# Altium PCB nanotiny.PcbDoc
Units mm, origin at the board's own origin, x right, y up, seen from the top; angles counter-clockwise.
Board outline 86.2 x 20 mm, 4 copper layers (Top Layer, Int1 (GND), Int2 (PWR), Bottom Layer), stack 1.369 mm thick; 28 components, 79 nets, 290 pads, 103 vias.
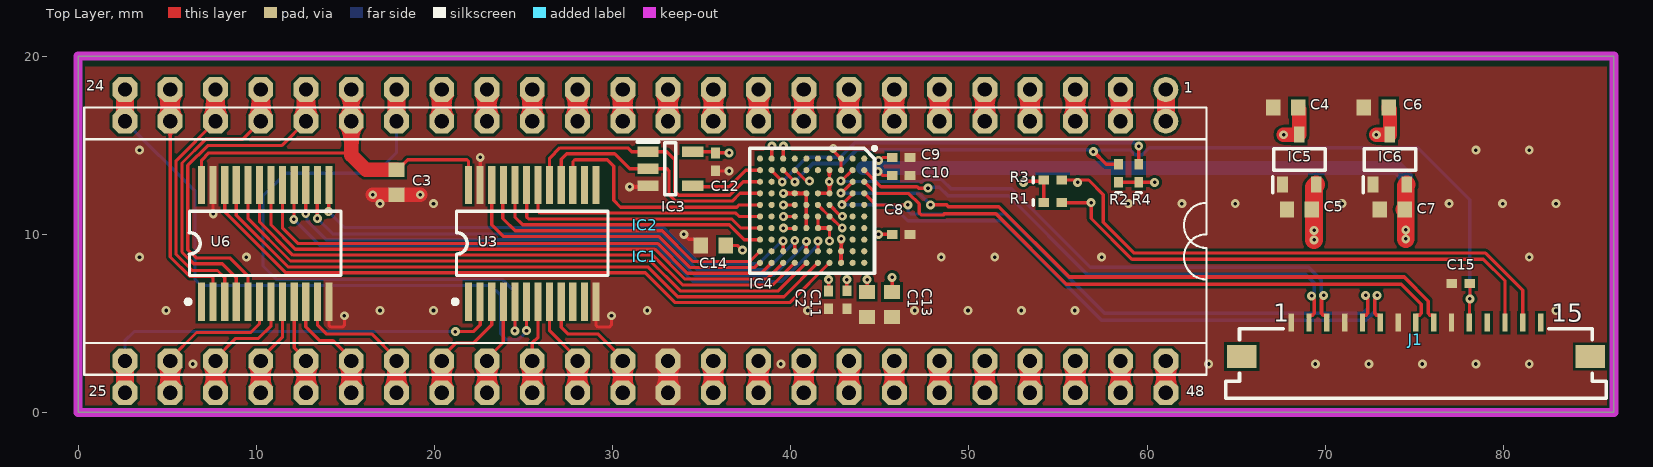
[diagram p0: Top Layer view]
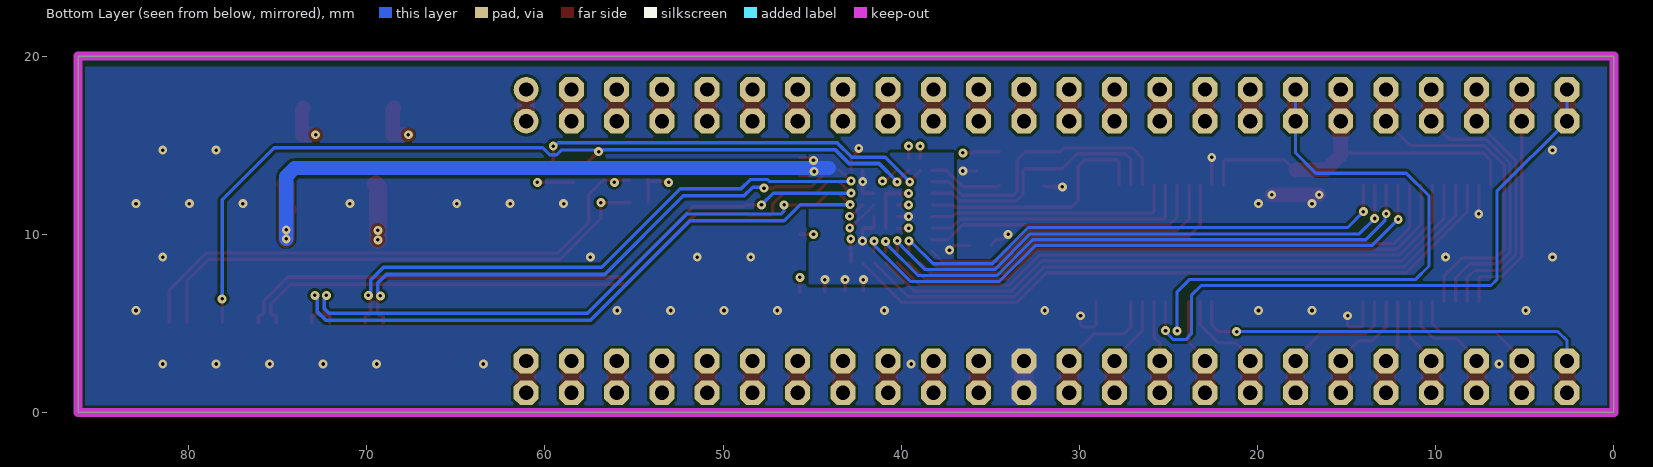
[diagram p1: Bottom Layer view, seen from below]
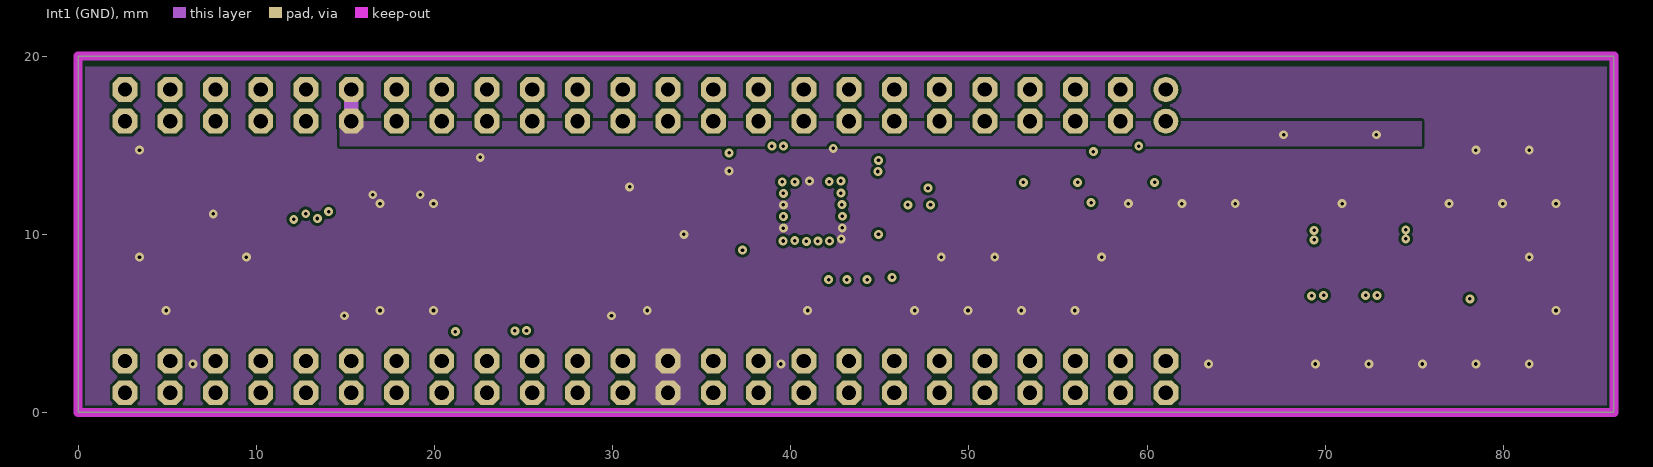
[diagram p2: Int1 (GND)]
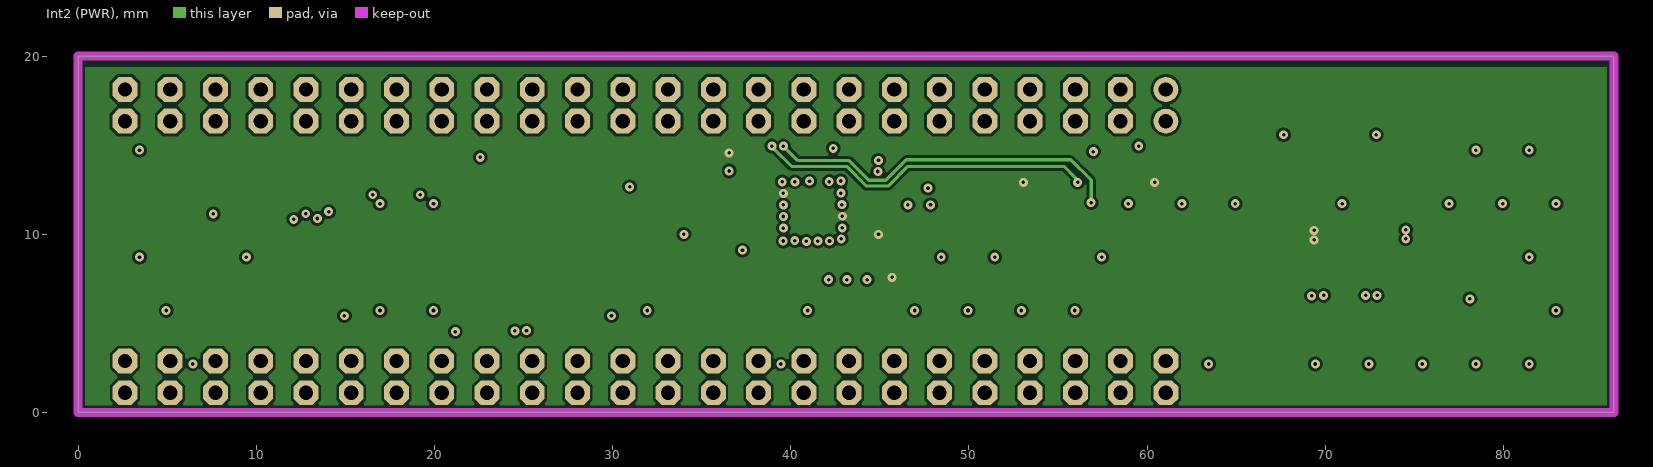
[diagram p3: Int2 (PWR)]

## Layer stack, top to bottom
Top Solder: solder mask 0.0254, SM-001, Dk 4
Top Layer: signal copper 0.035
Dielectric 1: prepreg 0.1295, PP-017, Dk 4.3
Dielectric 2: prepreg 0.1295, PP-017, Dk 4.3
Int1 (GND): signal copper 0.035
Dielectric 3: core 0.7112, Core-039, Dk 4.8
Int2 (PWR): signal copper 0.035
Dielectric 4: prepreg 0.1295, PP-017, Dk 4.3
Dielectric 5: prepreg 0.1295, PP-017, Dk 4.3
Bottom Layer: signal copper 0.035
Bottom Solder: solder mask 0.0254, SM-001, Dk 4

## Board outline
0,0 0,20 86.196,20 86.196,0

## Design rules (kind name [scope] priority, off if disabled: settings)
Clearance [All] p1: gap=0.15 ignorepadtopadclearanceinfootprint=FALSE
ComponentClearance [All] p1 off: gap=0.254 collisioncheckmode=3 verticalgap=0.254 showdistances=FALSE
DiffPairsRouting [All] p1: maxlimit=0.254 minlimit=0.2 mostfreqgap=0.2 toplayer_minwidth=0.18 toplayer_maxwidth=0.381 toplayer_prefwidth=0.18 midlayer1_minwidth=0.18 midlayer1_maxwidth=0.381 midlayer1_prefwidth=0.18 midlayer2_minwidth=0.18 midlayer2_maxwidth=0.381 midlayer2_prefwidth=0.18 bottomlayer_minwidth=0.18 bottomlayer_maxwidth=0.381 bottomlayer_prefwidth=0.18 maxuncoupledlength=12.7
HoleSize [All] p1: absolutevalues=TRUE maxlimit=2.54 minlimit=0.2 maxpercent=80.000 minpercent=20.000
PolygonConnect [All] p1: connectstyle=Direct reliefconductorwidth=0.254 reliefentries=4 polygonreliefangle="90 Angle" airgapwidth=0.254
RoutingVias [All] p1: holewidth=0.2 width=0.5 viastyle="Through Hole" minholewidth=0.2 minwidth=0.5 maxholewidth=0.3 maxwidth=0.6
SolderMaskExpansion [All] p1: expansion=0.102 istentingtop=FALSE
Width [All] p1: maxlimit=1 minlimit=0.18 preferedwidth=0.18
27 further rules are at their usual default settings.

## Classes and differential pairs
differential pair CSICK: +CSICK_P -CSICK_N
differential pair CSI1: +CSI1_P -CSI1_N
differential pair CSI0: +CSI0_P -CSI0_N

## Components (designator, comment, footprint, x,y, rotation, side; value= is the part's Value field where it differs from the comment)
C1 "Cap Semi" 1608[0603] 44.286,6.059 r270 top value=2u2
C2 "Cap Semi" 0402 42.127,6.313 r90 top value=100nF
C3 "Cap Semi" 1608[0603] 17.87,12.917 r90 top value=2u2
C4 "Cap Semi" 1608[0603] 67.781,17.108 r0 top value=2u2
C5 "Cap Semi" 1608[0603] 68.543,11.393 r180 top value=2u2
C6 "Cap Semi" 1608[0603] 72.861,17.108 r0 top value=2u2
C7 "Cap Semi" 1608[0603] 73.75,11.393 r180 top value=2u2
C8 "Cap Semi" 0402 46.191,9.996 r180 top value=100nF
C9 "Cap Semi" 0402 46.191,14.314 r180 top value=100nF
C10 "Cap Semi" 0402 46.191,13.298 r180 top value=100nF
C11 "Cap Semi" 0402 43.143,6.321 r90 top value=100nF
C12 "Cap Semi" 0402 35.777,14.06 r90 top value=100nF
C13 "Cap Semi" 1608[0603] 45.683,6.059 r270 top value=2u2
C14 "Cap Semi" 1608[0603] 35.65,9.361 r0 top value=100nF
C15 "Cap Semi" 0402 77.597,7.239 r0 top value=100nF
IC1 "DENISE_MOBO" DIP48-6 33.11,8.726 r180 top
IC2 "DENISE_DIP" DIP48-6 33.11,10.504 r180 top
IC3 "SN74LVC1G86DBVR" SOT95P280X145-5N 33.237,13.679 r0 top
IC4 "LIF-MD6000-6KMG80I" BGA80C65P10X10_700X700X120 41.197,11.322 r270 top
IC5 "XC6206P332MR" SOT95P280X130-3N 68.543,14.187 r90 top
IC6 "RT9166-12GVL" SOT95P280X130-3N 73.623,14.187 r90 top
J1 "686115183522" 686115183522 75.083,2.743 r0 top
R1 "Res2" 0402-A 54.7,11.774 r0 top value=1k
R2 "Res2" 0402-A 58.383,13.425 r90 top value=1k
R3 "Res2" 0402-A 54.7,13.044 r0 top value=1k
R4 "Res2" 0402-A 59.526,13.425 r90 top value=1k
U3 "SN74CBTD3861" DB024 25.49,9.488 r0 top
U6 "SN74CBTD3861" DB024 10.504,9.488 r0 top

## Footprints (in the part's own frame and the unit in brackets; to place one, negate y for a bottom-side part, rotate by r counter-clockwise, add the part's x,y. Pads: shape width x height; smd on the part's side, far side on the other; paste and mask are expansions set on the pad)
0402 [mm] "Chip Capacitor, Body 1.0x0.5mm, IPC High Density"
  rect 0.6x0.5 smd: 1(-0.5,0) 2(0.5,0)
  body extent -0.55,-0.3 0.55,0.3, height 1.3
0402-A [mm] "Chip Inductor, Body 1.0x0.5mm, IPC High Density"
  rect 0.6x0.5 smd: 1(-0.5,0) 2(0.5,0)
  silkscreen extent -1.1,-0.15 -1.1,0.15, body extent -0.55,-0.3 0.55,0.3, height 0.55
1608[0603] [mm] "Chip Capacitor, Body 1.6x0.8mm, IPC High Density"
  rect 0.8x0.9 smd: 1(-0.7,0) 2(0.7,0)
  body extent -0.87,-0.48 0.87,0.48, height 1.3
686115183522 [mm] "ZIF Connectors, Horizontal, Bottom Contact Low Profile, pitch 1mm, 15p"
  rect 0.3x1 smd: 1(-7,2.3) 2(-6,2.3) 3(-5,2.3) 4(-4,2.3) 5(-3,2.3) 6(-2,2.3) 7(-1,2.3) 8(0,2.3) 9(1,2.3) 10(2,2.3) 11(3,2.3) 12(4,2.3) 13(5,2.3) 14(6,2.3) 15(7,2.3)
  rect 1.65x1.3 smd: MP1(-9.775,0.4) MP2(9.775,0.4)
  silkscreen extent -10.68,-1.95 10.68,1.95, body extent -10.6,-1.9 10.6,2.35, height 1.24
BGA80C65P10X10_700X700X120 [mm]
  round 0.346 smd: A1(-2.925,2.925) A2(-2.275,2.925) A3(-1.625,2.925) A4(-0.975,2.925) A5(-0.325,2.925) A6(0.325,2.925) A7(0.975,2.925) A8(1.625,2.925) A9(2.275,2.925) A10(2.925,2.925) B1(-2.925,2.275) B2(-2.275,2.275) B3(-1.625,2.275) B4(-0.975,2.275) B5(-0.325,2.275) B6(0.325,2.275) B7(0.975,2.275) B8(1.625,2.275) B9(2.275,2.275) B10(2.925,2.275) C1(-2.925,1.625) C2(-2.275,1.625) C9(2.275,1.625) C10(2.925,1.625) D1(-2.925,0.975) D2(-2.275,0.975) D4(-0.975,0.975) D5(-0.325,0.975) D6(0.325,0.975) D7(0.975,0.975) D9(2.275,0.975) D10(2.925,0.975) E1(-2.925,0.325) E2(-2.275,0.325) E4(-0.975,0.325) E5(-0.325,0.325) E6(0.325,0.325) E7(0.975,0.325) E9(2.275,0.325) E10(2.925,0.325) F1(-2.925,-0.325) F2(-2.275,-0.325) F4(-0.975,-0.325) F5(-0.325,-0.325) F6(0.325,-0.325) F7(0.975,-0.325) F9(2.275,-0.325) F10(2.925,-0.325) G1(-2.925,-0.975) G2(-2.275,-0.975) G4(-0.975,-0.975) G5(-0.325,-0.975) G6(0.325,-0.975) G7(0.975,-0.975) G9(2.275,-0.975) G10(2.925,-0.975) H1(-2.925,-1.625) H2(-2.275,-1.625) H9(2.275,-1.625) H10(2.925,-1.625) J1(-2.925,-2.275) J2(-2.275,-2.275) J3(-1.625,-2.275) J4(-0.975,-2.275) J5(-0.325,-2.275) J6(0.325,-2.275) J7(0.975,-2.275) J8(1.625,-2.275) J9(2.275,-2.275) J10(2.925,-2.275) K1(-2.925,-2.925) K2(-2.275,-2.925) K3(-1.625,-2.925) K4(-0.975,-2.925) K5(-0.325,-2.925) K6(0.325,-2.925) K7(0.975,-2.925) K8(1.625,-2.925) K9(2.275,-2.925) K10(2.925,-2.925)
  silkscreen extent -3.6,-3.5 3.5,3.6, body extent -3.5,-3.5 3.5,3.5, height 1.2
DB024 [mm] "SSOP, Plastic; 24 Leads; Body Width 5.3 mm; Pitch 0.65 mm"
  rect 0.4x2.15 smd: 1(-3.575,-3.275) 2(-2.925,-3.275) 3(-2.275,-3.275) 4(-1.625,-3.275) 5(-0.975,-3.275) 6(-0.325,-3.275) 7(0.325,-3.275) 8(0.975,-3.275) 9(1.625,-3.275) 10(2.275,-3.275) 11(2.925,-3.275) 12(3.575,-3.275) 13(3.575,3.275) 14(2.925,3.275) 15(2.275,3.275) 16(1.625,3.275) 17(0.975,3.275) 18(0.325,3.275) 19(-0.325,3.275) 20(-0.975,3.275) 21(-1.625,3.275) 22(-2.275,3.275) 23(-2.925,3.275) 24(-3.575,3.275)
  silkscreen extent -4.45,-3.4 4.25,1.8
DIP48-6 [mil]
  round 55.12 hole 31.5: 1(-1100,-300)
  oct 55.12x55.12 hole 31.5: 2(-1000,-300) 3(-900,-300) 4(-800,-300) 5(-700,-300) 6(-600,-300) 7(-500,-300) 8(-400,-300) 9(-300,-300) 10(-200,-300) 11(-100,-300) 12(0,-300) 13(100,-300) 14(200,-300) 15(300,-300) 16(400,-300) 17(500,-300) 18(600,-300) 19(700,-300) 20(800,-300) 21(900,-300) 22(1000,-300) 23(1100,-300) 24(1200,-300) 25(1200,300) 26(1100,300) 27(1000,300) 28(900,300) 29(800,300) 30(700,300) 31(600,300) 32(500,300) 33(400,300) 34(300,300) 35(200,300) 36(100,300) 37(0,300) 38(-100,300) 39(-200,300) 40(-300,300) 41(-400,300) 42(-500,300) 43(-600,300) 44(-700,300) 45(-800,300) 46(-900,300) 47(-1000,300) 48(-1100,300)
  silkscreen extent -1190,-260 1290,260
SOT95P280X130-3N [mm]
  rect 0.9x0.6 smd: 1(-1.4,0.95) 2(-1.4,-0.95) 3(1.4,0)
  silkscreen extent -1.85,-1.45 0.6,1.5, body extent -1.4,-1.45 1.4,1.45, height 1.3
SOT95P280X145-5N [mm]
  rect 1.2x0.6 smd: 1(-1.25,0.95) 2(-1.25,0) 3(-1.25,-0.95) 4(1.25,-0.95) 5(1.25,0.95)
  silkscreen extent -1.85,-1.45 0.3,1.5, body extent -1.4,-1.45 1.4,1.45, height 1.45

## Part data
C1 C2 C3 C4 C5 C6 C7 C8 C9 C10 C11 C12 C13 C14 C15: "Capacitor (Semiconductor SIM Model)", LatestRevisionDate=29-May-2009, LatestRevisionNote="IPC-7351 Footprint Added.", PackageDescription="Chip Capacitor", PackageReference=C1206, Published=8-Jun-2000, Publisher="Altium Limited"
IC1: library part DENISE_DIP
IC3: "Integrated Circuit", Manufacturer_Name="Texas Instruments", Mouser Part Number=595-SN74LVC1G86DBVR, Arrow Part Number=SN74LVC1G86DBVR, Arrow Price/Stock=https://www.arrow.com/en/products/sn74lvc1g86dbvr/texas-instruments, Datasheet Link=http://www.ti.com/lit/ds/symlink/sn74lvc1g86.pdf, Height=1.45mm, Manufacturer_Part_Number=SN74LVC1G86DBVR, Mouser Price/Stock=https://www.mouser.co.uk/ProductDetail/Texas-Instruments/SN74LVC1G86DBVR/?qs=d9gICRQKuCcyH%2F0J6yE9tQ%3D%3D
IC4: "Integrated Circuit", Manufacturer_Name="Lattice Semiconductor", Mouser Part Number=842-LIFMD60006KMG80I, Arrow Part Number=LIF-MD6000-6KMG80I, Arrow Price/Stock=https://www.arrow.com/en/products/lif-md6000-6kmg80i/lattice-semiconductor, Datasheet Link=http://www.latticesemi.com/view_document?document_id=51662, Height=1.2mm, Manufacturer_Part_Number=LIF-MD6000-6KMG80I, Mouser Price/Stock=https://www.mouser.co.uk/ProductDetail/Lattice/LIF-MD6000-6KMG80I/?qs=F5EMLAvA7IDEfdUebejsLA%3D%3D
IC5: "Integrated Circuit", Manufacturer_Name=Torex, Datasheet Link=http://www.torexsemi.com/products/voltage_regulators/data/XC6206.pdf, Height=1.3mm, Manufacturer_Part_Number=XC6206P332MR
IC6: library part XC6206P332MR, "Integrated Circuit", Manufacturer_Name=Torex, Datasheet Link=http://www.torexsemi.com/products/voltage_regulators/data/XC6206.pdf, Height=1.3mm, Manufacturer_Part_Number=XC6206P332MR
J1: "WR-FPC SMT ZIF Horizontal Bottom Contact Low Profile, pitch 1mm, 15p", Contact Resistance=30mOhm, Manufacturer="Wurth Elektronik", Operating Temperature="-25 to +85degC", Rated Current=0.8A, Working Voltage=50VAC, ComponentLink1Description=Manufacturer, ComponentLink1URL=http://www.we-online.de, ComponentLink2Description=Datasheet, ComponentLink2URL=https://katalog.we-online.com/em/datasheet/686115183522.pdf, Length=21.2mm, Manufacturer Part Number=686115183522, Mounting Technology=SMT, Packaging="Tape and Reel", Pin Number=15, Pitch=1mm, Published Date="March 2021", Type=Horizontal
R1 R2 R3 R4: "Resistor", LatestRevisionDate=17-Jul-2002, LatestRevisionNote="Re-released for DXP Platform.", PackageDescription="Axial Device, Thru-Hole; 2 Leads; 0.4 in Pin Spacing", PackageReference=AXIAL-0.4, Published=8-Jun-2000, Publisher="Altium Limited"
U3 U6: "10-bit FET bus level shifting switch"

## Via types
v1: diameter 0.5, hole 0.2, Top Layer to Bottom Layer, tented both sides, 103 vias

## Nets (pads, with @x,y where several pads share a name; then routed paths per layer and width w, separated by ;. In a path a pad name is that pad's centre, name@x,y a point inside that pad or via, vN(x,y) a via of type N, cw(c..) or ccw(c..) an arc to the next point about the centre after c; other vN are vias at no path point)
7M: IC3.2 IC4.K4 U3.16 | length 14.8
  Top Layer w0.18: U3.16 27.115,14.209 27.424,14.517 30.113,14.517 30.951,13.679 IC3.2 33.056,13.679 33.161,13.574 33.161,12.231 33.364,12.028 33.533,11.859 36.71,11.859 37.148,12.297 IC4.K4
14M: IC3.4 IC4.K2 | length 4.2
  Top Layer w0.18: IC3.4 34.553,12.663 36.539,12.663 37.473,13.597 IC4.K2
B0: IC4.K6 U3.18 | length 14.1
  Top Layer w0.18: U3.18 25.811,12.759 25.811,11.294 25.916,11.188 36.916,11.188 37.107,10.997 IC4.K6
B1: IC4.K10 U3.22 | length 18.4
  Top Layer w0.18: U3.22 23.215,10.535 23.882,9.868 32.61,9.868 34.336,8.142 37.972,8.142 38.227,8.397 IC4.K10
B2: IC4.H10 U6.18 | length 32.6
  Top Layer w0.18: U6.18 10.829,10.522 12.193,9.158 32.386,9.158 34.062,7.482 38.657,7.482 IC4.H10
B3: IC4.J10 U6.17 | length 31.2
  Top Layer w0.18: U6.17 11.479,10.339 12.33,9.488 32.523,9.488 34.199,7.812 38.337,7.812 IC4.J10
BLANK: IC4.K9 U3.21 | length 17.6
  Top Layer w0.18: U3.21 23.839,12.737 23.839,10.885 24.526,10.198 32.781,10.198 34.507,8.472 37.697,8.472 IC4.K9
BURST: IC4.K7 U3.19 | length 15.2
  Top Layer w0.18: U3.19 25.185,12.743 25.185,10.964 25.291,10.858 36.693,10.858 37.204,10.347 IC4.K7
CCK: IC4.K5 U3.15 | length 14.1
  Top Layer w0.18: U3.15 27.776,12.774 27.776,14.082 27.882,14.187 29.703,14.187 30.062,13.828 30.062,11.901 30.443,11.52 36.965,11.52 37.092,11.647 IC4.K5
CDAC: IC3.1 IC4.K3 U3.17 | length 16
  Top Layer w0.18: U3.17 26.465,14.273 27.039,14.847 30.849,14.847 31.067,14.629 IC3.1 33.049,14.629 33.491,14.187 33.491,12.409 33.711,12.189 36.573,12.189 37.331,12.947 IC4.K3
CRESET_B: C15.2 IC4.H2 J1.11 R2.2 | length 50.5
  Top Layer w0.18: J1.11 78.099,5.059 78.099,6.354 v1(78.115,6.37) 78.115,7.221 C15.2
  Top Layer w0.2: IC4.H2 v1(40.226,12.944) ; v1(56.986,14.643) 57.704,13.925 R2.2
  Bottom Layer w0.18: v1(56.986,14.643) 57.048,14.704 57.224,14.704 57.252,14.732 59.055,14.732 59.328,14.459 59.729,14.459 60.129,14.859 75.184,14.859 78.105,11.938 v1@78.105,6.42
  Bottom Layer w0.2: v1(40.226,12.944) 40.226,12.951 41.247,13.972 42.928,13.972 43.688,14.732 56.719,14.732 56.751,14.7 56.929,14.7 v1(56.986,14.643)
CSI0_N: IC4.A2 J1.2 | length 30.2
  Top Layer w0.18: IC4.A2 45.056,12.663 47.091,12.663 47.168,12.586 v1(47.701,12.586)
  Top Layer w0.2: J1.2 69.083,5.393 69.133,5.443 69.266,5.443 69.383,5.561 v1@69.383,6.361
  Bottom Layer w0.2: v1(47.701,12.586) 47.758,12.643 48.334,12.643 48.822,12.155 52.23,12.155 56.644,7.741 68.894,7.741 69.369,7.266 69.369,6.759 69.23,6.62 v1(69.23,6.539)
CSI0_P: IC4.B2 J1.3 | length 32.7
  Top Layer w0.18: v1(42.807,12.989) 42.835,12.989 43.444,13.597 IC4.B2
  Top Layer w0.2: v1@69.783,6.361 69.783,5.561 69.901,5.443 70.033,5.443 70.083,5.393 J1.3
  Bottom Layer w0.18: v1(42.807,12.989) 42.842,12.954 47.376,12.954 47.498,13.076 48.467,13.076 48.477,13.066
  Bottom Layer w0.2: 48.477,13.066 48.988,12.555 52.395,12.555 56.81,8.141 69.059,8.141 69.769,7.431 69.769,6.788 69.908,6.649 v1(69.908,6.567)
CSI1_N: IC4.A4 J1.5 | length 33.7
  Top Layer w0.18: IC4.A4 44.772,11.647 v1(46.572,11.647)
  Top Layer w0.2: J1.5 72.083,5.393 72.133,5.443 72.266,5.443 72.383,5.561 v1@72.383,6.361
  Bottom Layer w0.18: v1(46.572,11.647) 46.584,11.635 46.584,11.284 46.73,11.138 52.035,11.138
  Bottom Layer w0.2: 52.035,11.138 57.602,5.57 72.118,5.57 72.383,5.835 72.383,6.361 72.258,6.486 v1(72.258,6.567)
CSI1_P: IC4.B4 J1.6 | length 36.2
  Top Layer w0.2: v1(42.865,11.662) 43.472,12.269 IC4.B4 ; v1@72.783,6.361 72.783,5.561 72.901,5.443 73.033,5.443 73.083,5.393 J1.6
  Bottom Layer w0.18: v1(42.865,11.662) 45.669,11.662 46.573,10.758 51.839,10.758 51.849,10.748
  Bottom Layer w0.2: 51.849,10.748 51.859,10.748 57.437,5.17 72.284,5.17 72.783,5.67 72.783,6.361 72.908,6.486 v1(72.908,6.567)
CSICK_N: IC4.A3 J1.8 | length 35.7
  Top Layer w0.18: IC4.A3 44.787,12.282 46.63,12.282 47.207,11.705 47.207,11.191 47.313,11.085 48.55,11.085
  Top Layer w0.2: 48.55,11.085 48.617,11.152 51.512,11.152 55.462,7.202 74.258,7.202 75.383,6.077 75.383,5.561 75.266,5.443 75.133,5.443 75.083,5.393 J1.8
CSICK_P: IC4.B3 J1.9 | length 37.8
  Top Layer w0.2: v1(42.807,12.311) 42.836,12.311 IC4.B3 ; v1(47.842,11.647) 48.728,11.647 48.738,11.647 48.833,11.552 51.678,11.552 55.628,7.602 74.424,7.602 75.783,6.243 75.783,5.561 75.901,5.443 76.033,5.443 76.083,5.393 J1.9
  Bottom Layer w0.2: v1(42.807,12.311) 47.179,12.311 v1(47.842,11.647)
G0: IC4.E9 U6.16 | length 34.4
  Top Layer w0.18: v1(12.105,10.835) 12.117,10.847 12.117,12.751 U6.16 ; IC4.E9 v1(41.522,9.619)
  Bottom Layer w0.18: v1(12.105,10.835) 13.579,9.361 32.475,9.361 34.481,7.355 39.486,7.355 41.461,9.33 41.461,9.558 v1(41.522,9.619)
G1: IC4.F9 U6.15 | length 32.7
  Top Layer w0.18: v1(12.779,11.15) U6.15 ; v1@40.869,9.604 40.871,9.602 40.871,9.049 IC4.F9
  Bottom Layer w0.18: v1(12.779,11.15) 12.841,11.089 12.841,10.777 13.926,9.691 32.612,9.691 34.618,7.685 39.054,7.685 40.735,9.366 40.735,9.38 40.872,9.517 v1(40.872,9.604)
G2: IC4.G9 U6.14 | length 31.2
  Top Layer w0.18: v1(13.425,10.885) 13.427,10.887 13.427,12.761 U6.14 ; IC4.G9@40.222,9.048 v1(40.222,9.646)
  Bottom Layer w0.18: v1(13.425,10.885) 14.289,10.021 32.749,10.021 34.755,8.015 38.658,8.015 40.222,9.579 v1(40.222,9.646)
G3: IC4.H9 U6.13 | length 29.3
  Top Layer w0.18: v1(14.06,11.266) 14.07,11.276 14.07,12.754 U6.13 ; IC4.H9 v1@39.572,9.615
  Bottom Layer w0.18: v1(14.06,11.266) 14.949,10.377 32.859,10.377 34.891,8.345 38.208,8.345 39.485,9.622 v1(39.572,9.622)
GND: C1.2 C2.1 C3.1 C4.1 C5.2 C6.1 C7.2 C8.1 C9.1 C10.1 C11.1 C12.1 C13.2 C14.1 C15.1 IC1.37 IC2.37 IC3.3 IC4.C1 IC4.C2 IC4.C9 IC4.C10 IC4.D6 IC4.E5 IC4.G2 IC4.G5 IC4.G7 IC5.1 IC6.1 J1.1 J1.4 J1.7 J1.10 U3.12 U3.23 U6.12 U6.23 | length 23.3
  Top Layer w0.18: U6.23 7.579,11.143 v1(7.583,11.139) ; U6.12 14.079,4.897 14.187,4.789 14.844,4.789 14.949,4.895 v1(14.949,5.424) ; U3.23 22.565,14.31 v1(22.569,14.314) ; U3.12 29.065,4.897 29.173,4.789 29.808,4.789 29.935,4.916 v1(29.935,5.424) ; v1(30.951,12.663) 31.921,12.663 IC3.3 ; v1(33.999,9.996) 34.274,9.721 34.64,9.721 34.95,9.411 C14.1 ; C12.1 35.85,13.487 35.915,13.552 v1(36.539,13.552) ; v1(39.587,11.647) IC4.G5 ; v1@39.636,10.321 40.196,10.321 IC4.G7 ; IC4.G2 40.265,13.597 40.823,13.04 40.989,13.04 v1(41.05,12.979) ; IC4.E5 IC4.D6 ; IC4.D6@42.217,10.997 42.217,10.992 42.847,10.362 v1(42.887,10.362) ; v1(42.381,14.822) 42.443,14.761 42.443,14.627 42.777,14.292 42.822,14.292 IC4.C2 ; IC4.C10 IC4.C9 42.829,9.054 v1(42.829,9.744)
  Top Layer w0.8: v1(16.538,12.217) C3.1 v1(19.202,12.217)
  Top Layer w1: IC1.37@33.11,1.233 IC2.37 IC2.37@33.11,3.011
  other v1: 6.445,2.72 39.445,2.72 63.445,2.72 69.445,2.72 72.445,2.72 75.445,2.72 78.445,2.72 81.445,2.72 4.945,5.72 16.945,5.72 19.945,5.72 31.945,5.72 40.945,5.72 46.945,5.72 49.945,5.72 52.945,5.72 55.945,5.72 82.945,5.72 3.445,8.72 9.445,8.72 48.445,8.72 51.445,8.72 57.445,8.72 81.445,8.72 39.587,10.347 16.945,11.72 19.945,11.72 58.945,11.72 61.945,11.72 64.945,11.72 70.945,11.72 76.945,11.72 79.945,11.72 82.945,11.72 3.445,14.72 78.445,14.72 81.445,14.72
NetIC1_1: IC1.1 IC2.1 | length 1.8
  Top Layer w1: IC1.1@61.05,16.473 IC2.1 IC2.1@61.05,18.251
NetIC1_2: IC1.2 IC2.2 | length 1.8
  Top Layer w1: IC1.2@58.51,16.473 IC2.2 IC2.2@58.51,18.251
NetIC1_3: IC1.3 IC2.3 | length 1.8
  Top Layer w1: IC1.3@55.97,16.473 IC2.3 IC2.3@55.97,18.251
NetIC1_4: IC1.4 IC2.4 | length 1.8
  Top Layer w1: IC1.4@53.43,16.473 IC2.4 IC2.4@53.43,18.251
NetIC1_5: IC1.5 IC2.5 | length 1.8
  Top Layer w1: IC1.5@50.89,16.473 IC2.5 IC2.5@50.89,18.251
NetIC1_6: IC1.6 IC2.6 | length 1.8
  Top Layer w1: IC1.6@48.35,16.473 IC2.6 IC2.6@48.35,18.251
NetIC1_7: IC1.7 IC2.7 | length 1.8
  Top Layer w1: IC1.7@45.81,16.473 IC2.7 IC2.7@45.81,18.251
NetIC1_8: IC1.8 IC2.8 | length 1.8
  Top Layer w1: IC1.8@43.27,16.473 IC2.8 IC2.8@43.27,18.251
NetIC1_9: IC1.9 IC2.9 | length 1.8
  Top Layer w1: IC1.9@40.73,16.473 IC2.9 IC2.9@40.73,18.251
NetIC1_10: IC1.10 IC2.10 | length 1.8
  Top Layer w1: IC1.10@38.19,16.473 IC2.10 IC2.10@38.19,18.251
NetIC1_11: IC1.11 IC2.11 | length 1.8
  Top Layer w1: IC1.11@35.65,16.473 IC2.11 IC2.11@35.65,18.251
NetIC1_12: IC1.12 IC2.12 | length 1.8
  Top Layer w1: IC1.12@33.11,16.473 IC2.12 IC2.12@33.11,18.251
NetIC1_13: IC1.13 IC2.13 | length 1.8
  Top Layer w1: IC1.13@30.57,16.473 IC2.13 IC2.13@30.57,18.251
NetIC1_14: IC1.14 IC2.14 | length 1.8
  Top Layer w1: IC1.14@28.03,16.473 IC2.14 IC2.14@28.03,18.251
NetIC1_15: IC1.15 IC2.15 | length 1.8
  Top Layer w1: IC1.15@25.49,16.473 IC2.15 IC2.15@25.49,18.251
NetIC1_16: IC1.16 IC2.16 | length 1.8
  Top Layer w1: IC1.16@22.95,16.473 IC2.16 IC2.16@22.95,18.251
NetIC1_17: IC1.17 IC2.17 | length 1.8
  Top Layer w1: IC1.17@20.41,16.473 IC2.17 IC2.17@20.41,18.251
NetIC1_18: IC1.18 IC2.18 U3.5 | length 36.5
  Top Layer w0.18: v1@24.474,4.535 v1(24.515,4.576) U3.5
  Top Layer w1: IC1.18@17.87,16.473 IC2.18@17.87,18.251
  Bottom Layer w0.18: IC2.18@17.87,18.251 17.87,14.568 16.727,13.425 11.647,13.425 10.377,12.155 10.377,8.218 11.139,7.456 23.839,7.456 24.515,6.78 v1(24.515,4.576)
NetIC1_20: IC1.20 IC2.20 U6.5 | length 19.6
  Top Layer w0.18: U6.5 9.529,7.669 8.523,8.675 6.621,8.675 6.16,9.136 6.16,13.863 7.274,14.976 11.42,14.976 IC1.20 ; IC1.20@12.79,16.473 IC1.20@12.79,16.6
  Top Layer w1: IC1.20@12.79,16.6 IC2.20 IC2.20@12.79,18.251
NetIC1_21: IC1.21 IC2.21 U6.4 | length 17.2
  Top Layer w0.18: U6.4 8.879,7.558 8.092,8.345 6.485,8.345 5.83,9 5.83,14 7.161,15.33 9.234,15.33 IC1.21 ; IC1.21@10.25,16.473 IC1.21@10.25,16.6
  Top Layer w1: IC1.21@10.25,16.6 IC2.21 IC2.21@10.25,18.251
NetIC1_22: IC1.22 IC2.22 U6.3 | length 14.8
  Top Layer w0.18: IC1.22 5.5,14.136 5.5,8.863 6.399,7.964 7.823,7.964 8.229,7.558 U6.3 ; IC1.22@7.71,16.473 IC1.22@7.71,16.6
  Top Layer w1: IC1.22@7.71,16.6 IC2.22 IC2.22@7.71,18.251
NetIC1_23: IC1.23 IC2.23 U6.2 | length 13.7
  Top Layer w0.18: IC1.23@5.17,16.473 IC1.23 5.17,8.726 6.262,7.634 7.474,7.634 7.579,7.529 U6.2
  Top Layer w1: IC1.23@5.17,16.473 IC2.23 IC2.23@5.17,18.251
NetIC1_24: IC1.24 IC2.24 U3.6 | length 37.4
  Top Layer w0.18: v1@25.109,4.535 v1(25.165,4.591) U3.6
  Top Layer w1: IC1.24@2.63,16.473 IC2.24@2.63,18.251
  Bottom Layer w0.18: IC2.24@2.63,18.251 IC1.24 6.567,12.409 6.567,7.456 6.897,7.126 23.153,7.126 23.712,6.567 23.712,4.408 24.034,4.086 24.718,4.086 25.165,4.533 v1(25.165,4.591)
NetIC1_25: IC1.25 IC2.25 U3.2 | length 25
  Top Layer w0.18: v1(21.172,4.535) 22.188,4.535 22.565,4.912 U3.2
  Top Layer w1: IC1.25@2.63,1.233 IC2.25@2.63,3.011
  Bottom Layer w0.18: IC2.25@2.63,2.376 2.63,4.027 3.138,4.535 v1(21.172,4.535)
NetIC1_26: IC1.26 IC2.26 U6.6 | length 8.8
  Top Layer w0.18: IC2.26@5.17,3.011 6.643,4.484 9.691,4.484 10.179,4.972 U6.6
  Top Layer w1: IC1.26@5.17,1.233 IC2.26 IC2.26@5.17,3.011
NetIC1_27: IC1.27 IC2.27 U6.7 | length 7
  Top Layer w0.18: IC2.27@7.71,3.011 8.853,4.154 10.123,4.154 10.829,4.86 U6.7
  Top Layer w1: IC1.27@7.71,1.233 IC2.27 IC2.27@7.71,3.011
NetIC1_28: IC1.28 IC2.28 U6.8 | length 5.5
  Top Layer w0.18: IC2.28@10.25,3.011 11.479,4.24 U6.8
  Top Layer w1: IC1.28@10.25,1.233 IC2.28 IC2.28@10.25,3.011
NetIC1_29: IC1.29 IC2.29 U6.9 | length 5.3
  Top Layer w0.18: U6.9 12.129,3.633 12.751,3.011 IC2.29@12.79,3.011
  Top Layer w1: IC1.29@12.79,1.233 IC2.29 IC2.29@12.79,3.011
NetIC1_30: IC1.30 IC2.30 U6.10 | length 6.5
  Top Layer w0.18: U6.10 12.779,4.8 13.552,4.027 14.314,4.027 IC2.30@15.33,3.011
  Top Layer w1: IC1.30@15.33,1.233 IC2.30 IC2.30@15.33,3.011
NetIC1_31: IC1.31 IC2.31 U6.11 | length 8.3
  Top Layer w0.18: U6.11 13.429,4.912 13.933,4.408 16.473,4.408 IC2.31@17.87,3.011 ; IC1.31@17.87,1.233 IC1.31@17.87,1.36
  Top Layer w1: IC1.31@17.87,1.36 IC2.31 IC2.31@17.87,3.011
NetIC1_32: IC1.32 IC2.32 U3.3 | length 6.7
  Top Layer w0.18: IC2.32@20.41,3.011 20.41,3.079 21.232,3.9 22.203,3.9 23.215,4.912 U3.3
  Top Layer w1: IC1.32@20.41,1.233 IC2.32 IC2.32@20.41,3.011
NetIC1_33: IC1.33 IC2.33 U3.4 | length 5.4
  Top Layer w0.18: IC2.33@22.95,3.011 23.865,3.926 U3.4
  Top Layer w1: IC1.33@22.95,1.233 IC2.33 IC2.33@22.95,3.011
NetIC1_34: IC1.34 IC2.34 U3.7 | length 5.1
  Top Layer w0.18: IC2.34@25.49,3.011 25.49,3.9 25.815,4.225 U3.7
  Top Layer w1: IC1.34@25.49,1.233 IC2.34 IC2.34@25.49,3.011
NetIC1_35: IC1.35 IC2.35 U3.8 | length 5.6
  Top Layer w0.18: U3.8 26.465,4.576 IC2.35@28.03,3.011
  Top Layer w1: IC1.35@28.03,1.233 IC2.35 IC2.35@28.03,3.011
NetIC1_36: IC1.36 IC2.36 U3.9 | length 7.4
  Top Layer w0.18: U3.9 27.115,4.774 27.481,4.408 29.173,4.408 IC2.36@30.57,3.011
  Top Layer w1: IC1.36@30.57,1.233 IC2.36 IC2.36@30.57,3.011
NetIC1_38: IC1.38 IC2.38 | length 1.8
  Top Layer w1: IC1.38@35.65,1.233 IC2.38 IC2.38@35.65,3.011
NetIC1_39: IC1.39 IC2.39 | length 1.8
  Top Layer w1: IC1.39@38.19,1.233 IC2.39 IC2.39@38.19,3.011
NetIC1_40: IC1.40 IC2.40 | length 1.8
  Top Layer w1: IC1.40@40.73,1.233 IC2.40 IC2.40@40.73,3.011
NetIC1_41: IC1.41 IC2.41 | length 1.8
  Top Layer w1: IC1.41@43.27,1.233 IC2.41 IC2.41@43.27,3.011
NetIC1_42: IC1.42 IC2.42 | length 1.8
  Top Layer w1: IC1.42@45.81,1.233 IC2.42 IC2.42@45.81,3.011
NetIC1_43: IC1.43 IC2.43 | length 1.8
  Top Layer w1: IC1.43@48.35,1.233 IC2.43 IC2.43@48.35,3.011
NetIC1_44: IC1.44 IC2.44 | length 1.8
  Top Layer w1: IC1.44@50.89,1.233 IC2.44 IC2.44@50.89,3.011
NetIC1_45: IC1.45 IC2.45 | length 1.8
  Top Layer w1: IC1.45@53.43,1.233 IC2.45 IC2.45@53.43,3.011
NetIC1_46: IC1.46 IC2.46 | length 1.8
  Top Layer w1: IC1.46@55.97,1.233 IC2.46 IC2.46@55.97,3.011
NetIC1_47: IC1.47 IC2.47 | length 1.8
  Top Layer w1: IC1.47@58.51,1.233 IC2.47 IC2.47@58.51,3.011
NetIC1_48: IC1.48 IC2.48 | length 1.8
  Top Layer w1: IC1.48@61.05,1.233 IC2.48 IC2.48@61.05,3.011
NetIC4_J2: IC4.J2 R4.2 | length 22.9
  Top Layer w0.2: IC4.J2 38.922,13.569 39.519,12.972 v1(39.519,12.944) ; R4.2 R4.2 59.527,14.95 v1(59.528,14.951)
  Bottom Layer w0.2: v1(39.519,12.944) 40.898,14.322 42.783,14.322 43.604,15.143 59.256,15.143 59.447,14.951 v1(59.528,14.951)
PIXELS: IC4.K8 U3.20 | length 16.1
  Top Layer w0.18: U3.20 24.515,10.971 24.958,10.528 36.557,10.528 37.388,9.697 IC4.K8
R0: IC4.G10 U6.19 | length 34.1
  Top Layer w0.18: U6.19 10.179,10.705 12.056,8.828 32.249,8.828 33.925,7.152 38.977,7.152 IC4.G10
R1: IC4.F10 U6.20 | length 35.6
  Top Layer w0.18: U6.20 9.529,10.889 11.92,8.498 32.113,8.498 33.789,6.822 39.297,6.822 IC4.F10
R2: IC4.E10 U6.21 | length 37
  Top Layer w0.18: U6.21 8.879,11.072 11.783,8.168 31.976,8.168 33.652,6.492 39.617,6.492 IC4.E10
R3: IC4.D10 U6.22 | length 38.5
  Top Layer w0.18: U6.22 8.229,11.256 11.646,7.838 31.839,7.838 33.515,6.162 39.937,6.162 IC4.D10
SCL: IC4.H1 J1.13 R1.2 | length 50.6
  Top Layer w0.18: IC4.H1 39.58,14.255 39.58,14.942 v1(39.587,14.949) ; R1.2 v1(56.859,11.774) 56.859,10.885 59.145,8.599 78.872,8.599 80.083,7.388 J1.13
  Int2 (PWR) w0.18: v1(39.587,14.949) 40.4,14.136 43.28,14.136 44.385,13.032 45.331,13.032 46.487,14.187 55.716,14.187 56.859,13.044 v1(56.859,11.774)
SDA: IC4.J1 J1.14 R3.2 | length 51
  Top Layer w0.18: IC4.J1 38.93,14.255 38.93,14.942 v1(38.937,14.949) ; R3.2 v1@56.097,13.044 ; v1(56.097,12.916) v1@56.097,13.043 ; v1@56.097,13.044 56.713,13.044 57.537,12.22 57.537,10.674 59.271,8.94 78.997,8.94 81.083,6.854 J1.14
  Int2 (PWR) w0.18: v1(38.937,14.949) 38.937,14.906 40.037,13.806 43.143,13.806 44.248,12.702 45.468,12.702 46.572,13.806 55.335,13.806 55.974,13.168 55.974,13.126 56.097,13.003 v1(56.097,12.916)
VCC: C5.1 C8.2 C12.2 C13.1 IC3.5 IC4.D5 IC4.F4 IC4.F5 IC4.F6 IC4.F7 IC4.G4 IC5.2 R1.1 R2.1 R3.1 R4.1 | length 15.6
  Top Layer w0.2: IC3.5 35.904,14.629 35.904,14.591 35.927,14.568 v1(36.539,14.568) ; v1(39.587,12.297) IC4.G4 IC4.F4 IC4.F5 IC4.F6 IC4.F7 ; IC4.D5 42.75,11.069 42.842,11.069 v1(42.9,11.012) ; v1(44.921,9.996) C8.2 ; C13.1 v1(45.683,7.583) ; v1(53.049,12.916) 53.107,12.973 54.129,12.973 R3.1 R1.1 ; R2.1 R4.1 59.536,12.916 v1(60.415,12.916)
  Top Layer w1: v1(69.367,9.68) v1(69.367,10.213) 69.367,12.661 IC5.2
VCC_1.2: C1.1 C2.2 C7.1 C9.2 C10.2 C11.2 C14.2 IC4.D2 IC4.D4 IC4.D7 IC4.E4 IC4.E6 IC4.E7 IC4.G6 IC6.2 | length 46.8
  Top Layer w0.18: C14.2@36.15,9.361 C14.2 37.02,9.361 37.274,9.107 v1(37.288,9.107) ; v1@39.587,11.012 39.602,10.997 IC4.G6 ; IC4.E6 IC4.E7 IC4.D7 v1(42.172,9.62) ; IC4.E4 IC4.D4 42.165,12.305 42.165,12.947 v1(42.158,12.954) ; C2.2 v1(42.127,7.456) ; v1@42.165,12.955 42.165,13.59 IC4.D2 ; C11.2 v1(43.143,7.456) ; C1.1 v1(44.286,7.456) ; v1(44.891,13.522) 44.923,13.522 45.144,13.301 45.689,13.301 C10.2 ; v1(44.921,14.143) 45.003,14.143 45.175,14.314 C9.2
  Top Layer w1: v1(74.512,9.742) v1(74.512,10.25) 74.512,11.331 C7.1 74.512,11.455 74.512,12.726 IC6.2
  Bottom Layer w0.8: 44.069,13.716 44.921,13.716 74.044,13.716 74.512,13.247 v1(74.512,10.25) v1(74.512,9.742)
  other v1: 39.587,10.997
VCC_5: C3.2 C4.2 C6.2 IC1.19 IC2.19 IC5.3 IC6.3 U3.24 U6.24 | length 28.9
  Top Layer w0.18: U6.24 6.929,14.165 7.332,14.568 15.203,14.568 15.33,14.441 ; C3.2 17.92,13.617 18.49,14.187 21.81,14.187 21.915,14.082 U3.24
  Top Layer w0.8: IC2.19@15.33,18.251 IC2.19 IC1.19 15.33,14.441 16.154,13.617 C3.2 ; v1(67.654,15.584) 68.54,15.584 IC5.3 68.543,16.996 68.481,17.058 C4.2 ; v1(72.861,15.584) 73.62,15.584 IC6.3 73.623,16.996 73.561,17.058 C6.2
  Int1 (GND) w0.8: IC1.19 IC2.19
pads on no net: IC4.A1 IC4.A5 IC4.A6 IC4.A7 IC4.A8 IC4.A9 IC4.A10 IC4.B1 IC4.B5 IC4.B6 IC4.B7 IC4.B8 IC4.B9 IC4.B10 IC4.D1 IC4.D9 IC4.E1 IC4.E2 IC4.F1 IC4.F2 IC4.G1 IC4.J3 IC4.J4 IC4.J5 IC4.J6 IC4.J7 IC4.J8 IC4.J9 IC4.K1 J1.12 J1.15 J1.MP1 J1.MP2 U3.1 U3.10 U3.11 U3.13 U3.14 U6.1

## Polygon pours and split planes (outlines as drawn)
GND on Bottom Layer "GND_L04_P005" (solid, pour order 5): -0.037,19.394 86.196,19.394 86.196,-0.037 -0.037,-0.037
VCC_1.2 on Bottom Layer "VCC_1.2_L04_P000" (solid, pour order 0): 37.047,14.568 45.175,14.568 45.175,7.202 37.047,7.202
GND on Int1 (GND) "GND_L02_P002" (solid, pour order 2): 86.196,19.394 86.196,-0.037 -0.037,-0.037 -0.037,19.394
VCC_5 on Int1 (GND) "VCC_5_L02_P001" (solid, pour order 1): 14.695,16.346 75.401,16.346 75.401,14.949 14.695,14.949
GND on Top Layer "GND_L01_P006" (solid, pour order 6): -0.037,19.394 37.936,19.394 37.936,7.837 44.667,7.837 44.667,19.394 86.196,19.394 86.196,-0.037 -0.037,-0.037
GND on Top Layer "GND_L01_P007" (solid, pour order 7): 45.429,19.394 45.429,14.949 45.683,14.695 36.92,14.695 36.92,19.394
VCC on Int2 (PWR) "VCC_L03_P003" (solid, pour order 3): -0.025,19.371 -0.025,-0.06 86.196,-0.06 86.196,19.371

## Keep-outs
Keep-Out Layer:
  the board outline again, w0.5

## Silkscreen, mask and mechanical layers (free items; w line width, h text height)
Bottom Solder:
  lines w0.18: 50.305,7.924 52.509,5.297 ; 52.509,5.297 52.556,5.834 50.597,8.169 51.1,8.591 51.113,8.74 51.017,8.853 50.936,8.951 50.757,8.966 50.351,8.626 50.203,8.639 49.603,9.353 49.44,9.548 49.292,9.561 48.886,9.22 48.87,9.041 49.619,8.149 49.606,8.001 49.184,7.646 49.171,7.498 49.348,7.287 49.527,7.271 50.013,7.679 51.972,5.344 52.509,5.297

## Text inside footprints (layer, text, board x,y; h text height)
IC1: Top Overlay "25" at 0.598,0.725 h1; Top Overlay "1" at 62.066,17.743 h1
IC2: Top Overlay "24" at 0.471,17.87 h1; Top Overlay "48" at 62.193,0.725 h1
J1: Top Overlay "15" at 82.683,5.093 h1.02; Top Overlay "1" at 67.083,5.093 h1.02